# EAGLE board Bai1 (EAGLE 9.7.0)

Size 100 x 77.29 mm. Coordinates in mm from the lower left corner, seen from the top.
Outline: 0,0 100,0 100,77.29 0,77.29 0,0
Copper layers (1*16): Top 0.035mm / dielectric 1.5mm / Bottom 0.035mm
Design rules "default": minimum track width 6mil, minimum drill 0.35mm, track to track 6mil, track to pad 6mil, pad to pad 6mil, via to via 6mil, smd to smd 6mil, copper to edge 40mil, drill to drill 6mil, minimum pad ring 10mil, minimum via ring 8mil, stop-mask expansion 4mil, vias tented up to drill 0mil, thermal gap 10mil

## Footprints (pad centres in the part's own frame; a part is rotated, then mirrored left to right if it is on the bottom)
LEDRD254W60D565H860B = drill 0.981 pad 1.581: 1 -1.27,0; 2 1.27,0
DIODE-AXIAL = drill 1: 1 -5.08,0; 2 5.08,0
BATTERY-GENERIC = drill 1.118 pad 3.15 octagon: + 2.54,0; - -2.54,0
RESAD1016W63L850D250B = drill 0.83 pad 1.43: 1 -5.08,0; 2 5.08,0
SWITCH-MOMENTARY-PTH-6.5MM = drill 1.016 pad 1.88: 1 -3.251,2.261; 2 3.251,2.261; 3 -3.251,-2.261; 4 3.251,-2.261
SWITCH-SPDT-PTH-8.5X3.7MM = drill 1.016 pad 1.88: 1 -2.54,0; 2 0,0; 3 2.54,0

## Placement (x,y rotation side)
D1  LED_RED  [LEDRD254W60D565H860B]  8.27,26.65 180 top
D2  LED_RED  [LEDRD254W60D565H860B]  23.51,31.73 180 top
D3  LED_RED  [LEDRD254W60D565H860B]  26.05,11.41 180 top
D4  LED_RED  [LEDRD254W60D565H860B]  53.99,24.11 0 top
D6  LED_RED  [LEDRD254W60D565H860B]  89.55,29.19 180 top
D7  LED_RED  [LEDRD254W60D565H860B]  112.41,26.65 180 top  (outside the outline)
D9  DIODEDIODE-AXIAL  [DIODE-AXIAL]  149.46,54.98 0 top  (outside the outline)
D10  LED_RED  [LEDRD254W60D565H860B]  160.35,52.51 0 top  (outside the outline)
D11  LED_RED  [LEDRD254W60D565H860B]  143.11,69.38 180 top  (outside the outline)
P1  BATTERYGENERIC  [BATTERY-GENERIC]  8.26,50.42 180 top
R1  330  [RESAD1016W63L850D250B]  12.08,21.57 0 top
R2  330  [RESAD1016W63L850D250B]  29.86,6.33 0 top
R3  1k  [RESAD1016W63L850D250B]  52.72,8.87 0 top
R4  330  [RESAD1016W63L850D250B]  60.34,29.19 90 top
R5  1k  [RESAD1016W63L850D250B]  75.58,31.73 180 top
R6  330  [RESAD1016W63L850D250B]  88.28,16.49 270 top
R7  330  [RESAD1016W63L850D250B]  116.22,8.87 0 top  (outside the outline)
R8  1k  [RESAD1016W63L850D250B]  136.54,46.97 270 top  (outside the outline)
R9  330  [RESAD1016W63L850D250B]  124.07,64.21 270 top  (outside the outline)
S1  SWITCH_MOMENTARY  [SWITCH-MOMENTARY-PTH-6.5MM]  24.78,25.38 90 top
S2  SWITCH_MOMENTARY  [SWITCH-MOMENTARY-PTH-6.5MM]  45.1,27.92 90 top
S3  SWITCH_MOMENTARY  [SWITCH-MOMENTARY-PTH-6.5MM]  83.2,25.38 90 top
S4  TOGGLE  [SWITCH-SPDT-PTH-8.5X3.7MM]  106.06,31.73 0 top  (outside the outline)
S5  SWITCH_MOMENTARY  [SWITCH-MOMENTARY-PTH-6.5MM]  134,58.79 90 top  (outside the outline)

## Library data of the parts
D1-D4 D6 D7 D10 D11 = Tinkercad; CATEGORY: Opto-Electronic; SUB-CATEGORY: LED
D9 P1 R1-R9 S1-S5 = Tinkercad

## Nets
D1_C: D1.2 R1.1
D3_C: D3.2 R2.1
D4_C: D4.2 R4.1
D6_C: D6.2 R6.1
D7_C: D7.2 R7.1
D10_A: D9.2 D10.1
D10_C: D10.2 R9.1
D11_C: D11.2 R9.1
P1+: D1.1 D2.1 P1.+ R5.2 S2.1 S2.2 S4.1 S5.2
P1-: P1.- R1.2 R2.2 R3.2 R4.2 R6.2 R7.2 R8.2 R9.2 S3.3 S3.4 S4.3
S1_1: D2.2 S1.1 S1.2
S1_3: D3.1 S1.3 S1.4
S2_3: D4.1 R3.1 S2.3 S2.4
S3_2: D6.1 R5.1 S3.1 S3.2
S4_P: D7.1 S4.2
S5_3: D9.1 D11.1 R8.1 S5.3

## Tracks (layer width: path | path; a pad name or v marks a point on that pad's centre or on a via)
D1_C  (1 unrouted)
D3_C  (1 unrouted)
D4_C  (1 unrouted)
D6_C  (1 unrouted)
D7_C  (1 unrouted)
D10_A  (1 unrouted)
D10_C  (1 unrouted)
D11_C  (1 unrouted)
P1+  (7 unrouted)
P1-  (12 unrouted)
S1_1  (2 unrouted)
S1_3  (2 unrouted)
S2_3  (3 unrouted)
S3_2  (3 unrouted)
S4_P  (1 unrouted)
S5_3  (3 unrouted)